# Altium PCB USB2CAN-base-0426.PcbDoc
Units mil, origin at the board's own origin, x right, y up, seen from the top; angles counter-clockwise.
Board outline 2199.85 x 1220.48 mil, 2 copper layers (Top, Bottom), stack 12.7 mil thick; 24 components, 18 nets, 98 pads, 21 vias.
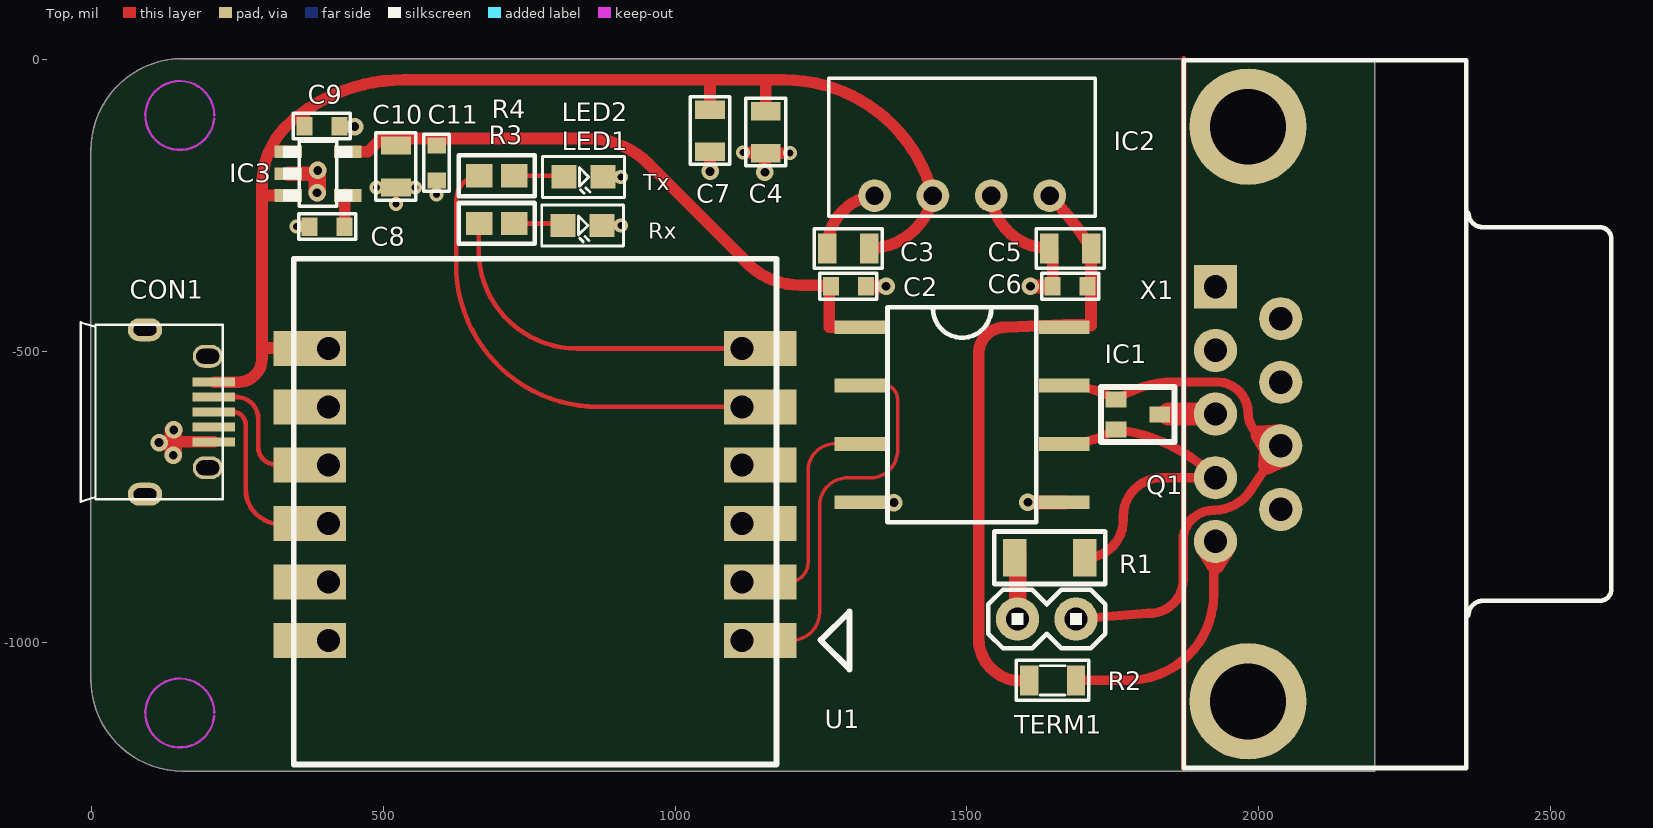
[diagram p0: Top view]
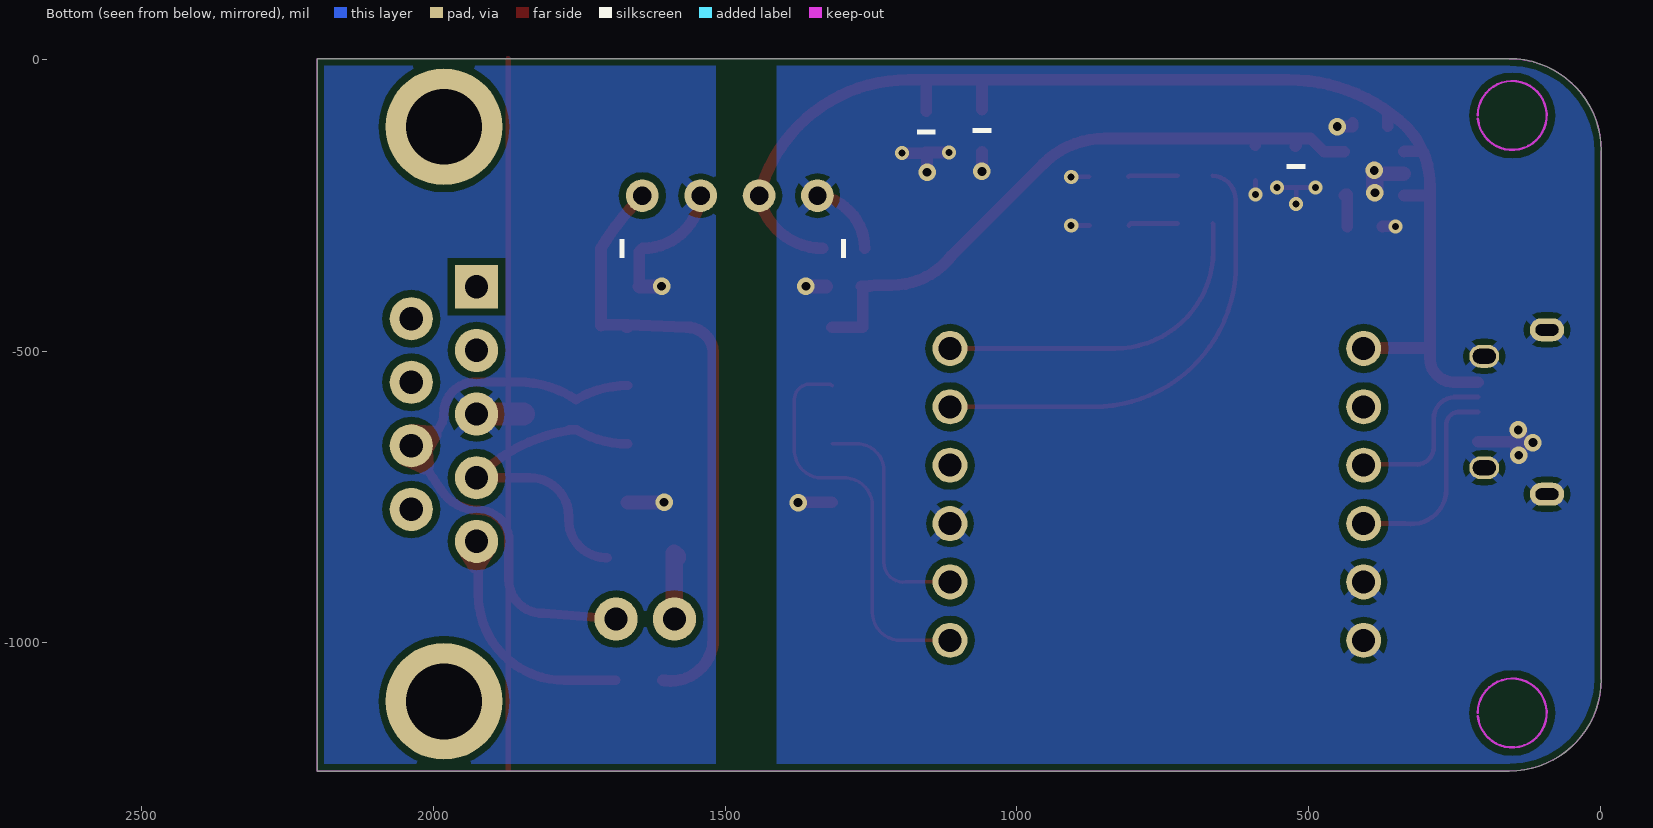
[diagram p1: Bottom view, seen from below]

## Layer stack, top to bottom
Solder Mask Top: solder mask 0.4, Solder Resist, Dk 3.5
Top: signal copper 1.35
Dielectric 1: dielectric 10, FR-4, Dk 4.3
Bottom: signal copper 1.35
Solder Mask Bottom: solder mask 0.4, Solder Resist, Dk 3.5

## Board outline
-1.03,-156.58 -1.03,-1062.09 ccw(c156.45,-1062.09) 156.45,-1219.57 2198.82,-1219.58 2198.82,0.9 156.45,0.9 ccw(c156.45,-156.58)

## Design rules (kind name [scope] priority, off if disabled: settings)
Clearance "Clearance - Default - DEFAULT- SMD" [IsVia vs IsSMTPin] p1: gap=6 ignorepadtopadclearanceinfootprint=FALSE
Clearance "Clearance - Default - DEFAULT - Via" [IsVia vs IsVia] p2: gap=6 ignorepadtopadclearanceinfootprint=FALSE
Clearance "Clearance - Default - DEFAULT - Net" [All] p3: gap=6 ignorepadtopadclearanceinfootprint=FALSE except(0: Arc-Hole Track-Hole SMDPad-Hole THPad-Hole Via-Hole Fill-Hole Poly-Hole Region-Hole Text-Hole; 10: Text-Text; 12: Arc-Fill Arc-Poly Arc-Region Track-Fill Track-Poly Track-Region SMDPad-Fill SMDPad-Poly SMDPad-Region THPad-Fill THPad-Poly THPad-Region Via-Fill Via-Poly Via-Region Fill-Fill Fill-Poly Fill-Region Poly-Poly Poly-Region Region-Region)
ComponentClearance "ComponentClearance - Default - DEFAULT" [All] p1: gap=6 collisioncheckmode=3 verticalgap=10 showdistances=FALSE
FanoutControl Fanout_Small [(CompPinCount < 5)] p3: bgadir=Out bgaviamode=Centered fanoutstyle=Auto fanoutdirection=OutThenIn viagrid=1 // Fanout_Small (Default Rule)
FanoutControl Fanout_SOIC [IsSOIC] p4: bgadir=Out bgaviamode=Centered fanoutstyle=Auto fanoutdirection=Alternating viagrid=1 // Fanout_SOIC (Default Rule)
HoleToHoleClearance "HoleToHoleClearance - Default - DEFAULT" [All] p1: gap=6 allowstackedmicrovias=TRUE
Length "Default Length" [All] p1: maxlimit=50000 minlimit=0
MaxMinImpedance "Default Impedance" [All] p1: minimum=50.00 maximum=150.0
ParallelSegment "Default Parallel Segment Adjasent" [All] p1: limit=1000 gap=200
ParallelSegment "Default Parallel Segment Same Layer" [All] p2: limit=1000 gap=200
PlaneConnect "Default PlaneConnect" [All] p1: pad.planeconnectstyle=Relief pad.reliefexpansion=20 pad.reliefentries=4 pad.reliefconductorwidth=15 pad.reliefairgap=10 via.planeconnectstyle=Direct via.reliefexpansion=20 via.reliefentries=4 via.reliefconductorwidth=15 via.reliefairgap=10
PolygonConnect "PolygonConnect - Default SMT" [IsSMTPin] p1: thpad.connectstyle=Relief thpad.reliefconductorwidth=10 thpad.reliefentries=4 thpad.polygonreliefangle="45 Angle" thpad.airgapwidth=10 smdpad.connectstyle=Direct smdpad.reliefconductorwidth=10 smdpad.reliefentries=4 smdpad.polygonreliefangle="45 Angle" smdpad.airgapwidth=10 via.connectstyle=Direct via.reliefconductorwidth=10 via.reliefentries=4 via.polygonreliefangle="45 Angle" via.airgapwidth=10
PolygonConnect "PolygonConnect - Default Pad" [All] p2: thpad.connectstyle=Relief thpad.reliefconductorwidth=15 thpad.reliefentries=4 thpad.polygonreliefangle="45 Angle" thpad.airgapwidth=10 smdpad.connectstyle=Direct smdpad.reliefconductorwidth=15 smdpad.reliefentries=4 smdpad.polygonreliefangle="45 Angle" smdpad.airgapwidth=10 via.connectstyle=Direct via.reliefconductorwidth=15 via.reliefentries=4 via.polygonreliefangle="45 Angle" via.airgapwidth=10
RoutingLayers "RoutingLayers - Default - DEFAULT" [All] p1: top layer_v5=TRUE bottom layer_v5=TRUE
RoutingPriority "RoutingPriority - Default - DEFAULT" [All] p1: routingpriority=3
RoutingTopology "Default Routing Topology" [All] p1: topology=Shortest
RoutingVias "RoutingVias - Default - DEFAULT" [All] p1: holewidth=12 width=24 viastyle="Through Hole" minholewidth=12 minwidth=24 maxholewidth=12 maxwidth=24
SMDToCorner "SMDToCorner - Default - DEFAULT" [All] p1: distance=60000
SolderMaskExpansion [All] p1: expansion=4 istentingtop=FALSE
Width "Default Width" [All] p1: maxlimit=40 minlimit=5 preferedwidth=8
22 further rules are at their usual default settings.

## Components (designator, comment, footprint, x,y, rotation, side; value= is the part's Value field where it differs from the comment)
C2 "C0603-1" C0603-1 1296.75,-389.09 r0 top
C3 "C0805$2F$2-1" C0805$2F$2-1 1296.75,-324.09 r0 top
C4 "C0805$2F$2-1" C0805$2F$2-1 1155.36,-124.96 r270 top
C5 "C0805$2F$2-1" C0805$2F$2-1 1676.75,-324.09 r0 top
C6 "C0603-1" C0603-1 1676.75,-389.09 r180 top
C7 "C0805$2F$2-1" C0805$2F$2-1 1059.78,-122.38 r270 top
C8 "C0603-1" C0603-1 403.95,-286.89 r180 top
C9 "C0603-1" C0603-1 394.93,-114.68 r0 top
C10 "C0805$2F$2-1" C0805$2F$2-1 521.6,-183.87 r90 top
C11 "C0603-1" C0603-1 591.43,-177.69 r270 top
CON1 "MIC_USB-N" MIC_USB-N 210,-604.45 r270 top
IC1 "DUB-R-PDSO-G8-1" DUB-R-PDSO-G8-1 1491.67,-609.09 r270 top
IC2 "B0505S_V-1" B0505S_V-1 1491.67,-233.77 r0 top
IC3 "SOT23-5L-1" SOT23-5L-1 388.19,-196.26 r270 top
LED1 "LED-0603" LED-0603 841.6,-284.9 r0 top
LED2 "LED-0603" LED-0603 842.99,-201.64 r0 top
Q1 "NUP2125-SOT-323" NUP2125-SOT-323 1755.33,-608.77 r270 top
R1 "C1206" C1206 1641.67,-854.09 r0 top
R2 "R0805-1" R0805-1 1646.67,-1064.09 r0 top
R3 "R0603" R0603 694.48,-281.4 r270 top
R4 "R0603" R0603 694.48,-199.78 r270 top
TERM1 "1X02$2F$2-1" 1X02$2F$2-1 1686.67,-959.09 r180 top
U1 "UCAN_M" UCAN_M 346.86,-342.01 r0 top
X1 "DB9_MALE-1" DB9_MALE-1 1981.53,-607.93 r270 top

## Footprints (in the part's own frame and the unit in brackets; to place one, negate y for a bottom-side part, rotate by r counter-clockwise, add the part's x,y. Pads: shape width x height; smd on the part's side, far side on the other; paste and mask are expansions set on the pad)
1X02$2F$2-1 [mil]
  round 74 hole 40: 1(0,0) 2(100,0)
  silkscreen extent -50,-50 150,50
B0505S_V-1 [mil]
  round 56 hole 31.5: 1(-150,0) 2(-50,0) 3(50,0) 4(150,0)
  silkscreen extent -228,-35 228,201
C0603-1 [mm]
  rect 0.7x0.8 smd: 1(-0.762,0) 2(0.762,0)
  silkscreen extent -1.24,-0.56 1.24,0.56
C0805$2F$2-1 [mm]
  rect 0.8x1.3 smd: 1(0.914,0) 2(-0.914,0)
  silkscreen extent -1.47,-0.86 1.47,0.86
C1206 [mil]
  rect 40x65 smd: 1(-60,0) 2(60,0)
  silkscreen extent -95,-45 95,45
DB9_MALE-1 [mil]
  round 74 hole 40: 1(218.11,-55.9) 2(109.06,-55.9) 3(0,-55.9) 4(-109.05,-55.9) 6(163.39,55.91) 7(54.33,55.91) 8(-54.33,55.91) 9(-163.38,55.91)
  rect 74x74 hole 40: 5(-218.11,-55.9)
  round 200 hole 130: G1(-492.12,0) G2(492.13,0)
  silkscreen extent -606,-110 606,622
DUB-R-PDSO-G8-1 [mm]
  rect 0.6x2.2 smd: 1(-3.81,-4.445) 2(-1.27,-4.445) 3(1.27,-4.445) 4(3.81,-4.445) 5(3.81,4.445) 6(1.27,4.445) 7(-1.27,4.445) 8(-3.81,4.445)
  silkscreen extent -4.67,-3.25 4.68,3.23
LED-0603 [mil]
  rect 43x40 smd: A(-33.5,0) K(33.5,0)
  silkscreen extent -70,-35 70,35
MIC_USB-N [mm]
  rect 0.4x1.85 smd: 1(-1.3,0) 2(-0.65,0) 3(0,0) 4(0.65,0) 5(1.3,0)
  oval 1x1.5 hole 0.5 slot 1 at 90 deg: 6(-3.575,-3) 7(3.575,-3)
  oval 1x1.3 hole 0.65 slot 1 at 90 deg: 10(-2.425,-0.27) 11(2.425,-0.27)
  silkscreen extent -3.9,-5.8 3.9,0.38
NUP2125-SOT-323 [mm]
  rect 0.7x0.9 smd: 1(-0.65,0) 2(0.65,0) 3(0,1.9)
  silkscreen extent -1.2,-0.65 1.19,2.54
R0603 [mil]
  rect 40x45 smd: 1(0,30) 2(0,-30)
  silkscreen extent -35,-65 35,65
R0805-1 [mm]
  rect 0.8x1.3 smd: 1(-1.016,0) 2(1.016,0)
  silkscreen extent -1.57,-0.86 1.57,0.86
SOT23-5L-1 [mm]
  rect 0.55x1.2 smd: 1(-0.95,-1.3) 2(0,-1.3) 3(0.95,-1.3) 4(0.95,1.3) 5(-0.95,1.3)
  silkscreen extent -1.42,-1.5 1.42,1.5
UCAN_M [mm]
  round 1.524 hole 1: 1(19.5,-16.6) 2(19.5,-14.06) 3(19.5,-11.52) 4(19.5,-8.98) 5(19.5,-6.44) 6(19.5,-3.9) 7(1.5,-3.9) 8(1.5,-6.44) 9(1.5,-8.98) 10(1.5,-11.52) 11(1.5,-14.06) 12(1.5,-16.6)
  rect 3.15x1.524 smd: 1(20.3,-16.6) 2(20.3,-14.06) 3(20.3,-11.52) 4(20.3,-8.98) 5(20.3,-6.44) 6(20.3,-3.9) 7(0.7,-3.9) 8(0.7,-6.44) 9(0.7,-8.98) 10(0.7,-11.52) 11(0.7,-14.06) 12(0.7,-16.6)
  silkscreen extent 0,-22 24.18,0

## Via types
v1: diameter 30, hole 15, Top to Bottom, tented both sides, 12 vias
v2: diameter 24, hole 12, Top to Bottom, tented both sides, 9 vias

## Nets (pads, with @x,y where several pads share a name; then routed paths per layer and width w, separated by ;. In a path a pad name is that pad's centre, name@x,y a point inside that pad or via, vN(x,y) a via of type N, cw(c..) or ccw(c..) an arc to the next point about the centre after c; other vN are vias at no path point)
$$$1: C8.1 IC3.4 | length 61.1
  Top w20: C8.1 433.95,-231.93 437.65,-231.93 IC3.4
$$$2: LED2.A R4.1 | length 85.8
  Top w8: R4.1 807.63,-199.78 LED2.A
$$$3: LED1.A R3.1 | length 85.1
  Top w8: R3.1 804.61,-281.4 LED1.A
$$$14: R2.2 X1.1 | length 522.1
  Top w16: R2.2 1775.43,-1064.09 ccw(c1775.43,-916.87) 1920.87,-939.74 1920.87,-939.67 ccw(c1785.35,-917.57) 1922.67,-917.57 1922.67,-875.68 1925.39,-872.95 ccw(c1875.63,-868.13) 1925.63,-868.13 1925.63,-866.04 X1.1
  Top w32: X1.1@1907.76,-837.07 1925.63,-866.04 1943.5,-837.07 X1.1 X1.1@1907.76,-837.07
$$$18: R1.1 TERM1.2 | length 123.1
  Top w30: R1.1 1581.67,-851.11 1586.67,-846.1 TERM1.2
CANH: IC1.7 Q1.1 TERM1.1 X1.7 | length 1271.4
  Top w8: Q1.1 1755.52,-582.98 Q1.1@1755.62,-582.98 ; X1.7@2033.12,-664.79 2033.12,-662.6 X1.7@2032.58,-662.06 ; X1.7@2032.58,-662.06 X1.7@2037.23,-662.06 ; X1.7@2032.58,-662.06 X1.7@2037.23,-662.06 ; X1.7@2037.23,-662.06 X1.7 X1.7@2037.23,-662.06
  Top w16: IC1.7 cw(c1666.67,-734.35) 1753.64,-582.2 1753.81,-582.2 1754.05,-582.43 cw(c1666.67,-734.35) Q1.1 ; TERM1.1 1809.99,-949.32 1810.08,-949.32 ccw(c1812.48,-891.33) 1870.52,-891.33 1870.52,-816.64 1870.67,-816.49 cw(c1921.53,-824.4) 1921.53,-772.93 1921.58,-772.88 1924.45,-772.88 ccw(c1921.53,-695.08) 1986.51,-737.96 ; Q1.1@1755.62,-582.98 cw(c1854.21,-730.57) 1854.21,-553.08 1932.01,-553.08 cw(c1928.11,-606.36) 1981.53,-606.36 1981.6,-606.43 1981.6,-608.93 ccw(c2025.34,-606.36) 2002.1,-643.5 ; 1986.53,-737.94 cw(c6088.56,-3442.56) 2014.9,-695.4 cw(c6088.56,-3442.56) X1.7 X1.7@2011.53,-647.94 ; X1.7@2016.42,-661.39 X1.7@2011.53,-647.94 ; 2002.1,-643.5 ccw(c2025.34,-606.36) X1.7@2011.53,-647.94 ; 2002.1,-643.5 ccw(c2025.34,-606.36) X1.7@2011.53,-647.94
  Top w21.94: 2002.1,-643.5 X1.7@2011.53,-647.94
  Top w32: X1.7@2032.58,-662.06 X1.7@2016.42,-661.39 ; X1.7@2033.12,-664.79 X1.7@2019.32,-672.88 ; X1.7@2013.56,-663.06 X1.7@2016.42,-661.39 ; X1.7@2013.56,-663.06 X1.7@2019.32,-672.88 ; X1.7@2013.56,-663.06 2002.1,-643.5 2036.09,-641.31 X1.7 ; X1.7@2015.91,-672.73 2014.9,-695.4 2045.97,-681.5 X1.7 ; X1.7@2015.91,-672.73 X1.7@2019.32,-672.88 ; X1.7@2015.91,-672.73 X1.7@2016.42,-661.39 ; X1.7@2016.42,-661.39 X1.7@2019.32,-672.88 ; X1.7@2019.32,-672.88 X1.7
CANL: IC1.6 Q1.2 R1.2 X1.2 | length 772.6
  Top w16: IC1.6 ccw(c1666.67,-487.84) Q1.2@1754.42,-634.9 ; R1.2 1704.97,-854.09 1705.05,-854.09 ccw(c1703,-789.25) 1767.87,-789.25 1767.87,-783.13 cw(c1833.99,-783.12) 1833.99,-716.99 X1.2 ; Q1.2@1754.49,-634.83 Q1.2@1754.42,-634.9 ; Q1.2@1754.54,-634.83 1755.01,-634.36 Q1.2 ; Q1.2@1754.42,-634.9 1766.56,-634.9 Q1.2@1767.76,-636.11 ; Q1.2@1767.76,-636.11 cw(c1721.27,-921.35) X1.2 ; Q1.2@1767.76,-636.11 cw(c1721.27,-921.35) X1.2
CANRX: IC1.2 U1.1 | length 698.2
  Top w6: U1.1@1114.58,-995.55 1198.85,-995.55 ccw(c1199.43,-947.36) 1247.62,-947.36 1247.62,-764.53 cw(c1294.86,-764.53) 1291.48,-717.41 1333.74,-717.41 ccw(c1333.74,-669.96) 1381.05,-673.66 1381.05,-583.07 ccw(c1354.66,-583.07) 1350.72,-556.98 1318.78,-556.98 IC1.2
CANTX: IC1.3 U1.2 | length 404.8
  Top w6: U1.2@1114.58,-895.55 1190.41,-895.55 ccw(c1194.12,-861.96) 1227.93,-861.96 1227.93,-704.65 cw(c1273.72,-704.65) 1269.02,-659.09 IC1.3
COLDVDD: C5.1 C6.1 IC1.8 IC2.4 R2.1 | length 1096.4
  Top w20: R2.1 1604.55,-1064.09 1604.12,-1064.53 1602.5,-1064.53 1602.23,-1064.79 cw(c1593.11,-992.23) 1519.97,-992.23 1519.97,-501.71 cw(c1565.68,-504.91) 1565.68,-459.09 1667.04,-454.97 1667.23,-454.78 1710.77,-454.78 1712.54,-456.55 1712.54,-324.3 C5.1 ccw(c1298.52,-576.92) IC2.4 ; IC1.8 1669.37,-459.12 1669.37,-457.22 1671.81,-454.78 1671.74,-454.78 1667.77,-454.94 IC1.8@1667.07,-454.94
COLDVSS: C5.2 C6.2 IC1.5 IC2.3 Q1.3 X1.3 | length 410.8
  Top w8: Q1.3 1830.97,-607.93 Q1.3@1845.22,-607.93
  Top w20: IC2.3 ccw(c1640.75,-224.59) C5.2 1646.75,-330.09 C6.2
  Top w24: v1(1604.4,-759.09) IC1.5 ; v1(1608.62,-389.09) C6.2
  Top w40: Q1.3@1845.22,-607.93 X1.3
DM: CON1.2 U1.9 | length 283.4
  Top w8: CON1.2 251.13,-578.86 cw(c248.9,-615.79) 285.89,-615.79 285.89,-664.66 ccw(c315.5,-664.66) 318.7,-694.1 404.46,-694.09 U1.9@405.92,-695.55
DP: CON1.3 U1.10 | length 353
  Top w8: CON1.3 245.55,-604.45 cw(c242.52,-626.09) 264.37,-626.09 264.37,-736.39 ccw(c324.35,-736.39) 334.27,-795.55 U1.10@405.92,-795.55
GND: C2.2 C3.2 C4.1 C7.1 C8.2 C9.2 C10.2 C11.2 CON1.5 CON1.6 CON1.7 CON1.10 CON1.11 IC1.4 IC2.1 IC3.2 LED1.K LED2.K U1.3 U1.11 U1.12 | length 849.7
  Top w8: v2@488.93,-219.87 C10.2 ; v2(521.6,-247.7) C10.2 ; v2@554.37,-219.87 C10.2 ; v2(591.4,-232) C11.2 ; LED1.K v2(906.9,-284.9) ; LED2.K LED2.K v2(906.9,-201.6)
  Top w15: C9.2 C9.2@424.93,-109.28
  Top w20: v1(116.06,-656.73) 113.1,-655.63 CON1.5 ; v2(351.7,-286.5) 373.56,-286.5 C8.2 ; C9.2@424.93,-109.28 424.93,-115.49 v1(451.3,-115.46) ; C7.1 1059.83,-158.43 v1(1059.83,-192.34) ; v2(1116.05,-159.92) 1157.23,-159.92 C4.1@1158.27,-160.96 ; v1(1153.86,-193.81) 1153.86,-162.47 C4.1 C4.1@1158.27,-160.96 ; v2(1196.63,-160.96) C4.1@1158.27,-160.96 ; C3.2 cw(c1351.62,-324.09) IC2.1 ; IC1.4 1374.4,-759.09 v1(1374.92,-759.62)
  Top w24: C2.2 v1(1361.38,-389.09)
  Top w25: IC3.2 v1@386.6,-196.26
  Top w30: v1(140.3,-678.6) 140.3,-635.8 v1(141,-635.1) ; v1(386.6,-228.9) 386.6,-196.26 386.6,-191.7 v1(387.7,-190.6)
  other v2: 488.9,-219.9 554.4,-219.9
LED_RX: R3.2 U1.6 | length 593.5
  Top w8: R3.2 663.41,-282.47 663.41,-329.27 ccw(c831.69,-327.26) 831.69,-495.55 U1.6@1114.58,-495.55
LED_TX: R4.2 U1.5 | length 802.6
  Top w8: R4.2 ccw(c666.45,-241.05) 625.13,-241.05 625.13,-366.98 ccw(c868.85,-351.34) 868.85,-595.55 U1.5@1114.58,-595.55
VBUS: C3.1 C4.2 C7.2 C9.1 CON1.1 IC2.2 IC3.1 IC3.3 U1.7 | length 5418.7
  Top w20: CON1.1 251.55,-553.27 ccw(c251.55,-512.44) 292.38,-512.44 ccw(c251.55,-512.44) 292.24,-509.12 292.24,-494.69 ; IC3.3 336.93,-233.58 292.24,-233.58 292.24,-222.36 ; IC3.1 336.16,-158.01 304.65,-158.01 ; C9.1 364.93,-91.48 371.9,-84.51 372.12,-84.51 ; U1.7@405.92,-495.55 405.05,-494.69 292.24,-494.69 ; C7.2 1059.78,-35.46 1059.67,-35.35 ; C4.2 1155.36,-36.28 1154.44,-35.35 ; C3.1 ccw(c1332.75,-213.25) 1440.02,-241.12 ccw(c1332.75,-213.25) IC2.2 ; 292.24,-494.69 292.24,-222.36 ; 292.24,-222.36 292.24,-216.98 ; 292.24,-216.98 cw(c438.59,-216.98) 304.65,-158.01 ; 292.24,-216.98 cw(c438.59,-216.98) 304.65,-158.01 ; 292.24,-216.98 cw(c438.59,-216.98) 304.65,-158.01 ; 304.65,-158.01 cw(c438.59,-216.98) 329.37,-119.58 ; 304.65,-158.01 cw(c438.59,-216.98) 329.37,-119.58 ; 304.65,-158.01 cw(c438.59,-216.98) 329.37,-119.58 ; 304.65,-158.01 cw(c438.59,-216.98) 329.37,-119.58 ; 329.37,-119.58 329.37,-119.46 330.43,-118.4 330.43,-118.23 332.76,-115.91 ; 332.76,-115.91 cw(c534.66,-328.67) 372.12,-84.51 ; 332.76,-115.91 cw(c534.66,-328.67) 372.12,-84.51 ; 332.76,-115.91 cw(c534.66,-328.67) 372.12,-84.51 ; 332.76,-115.91 cw(c534.66,-328.67) 372.12,-84.51 ; 372.12,-84.51 cw(c534.66,-328.67) 534.66,-35.35 ; 372.12,-84.51 cw(c534.66,-328.67) 534.66,-35.35 ; 372.12,-84.51 cw(c534.66,-328.67) 534.66,-35.35 ; 372.12,-84.51 cw(c534.66,-328.67) 534.66,-35.35 ; 372.12,-84.51 cw(c534.66,-328.67) 534.66,-35.35 ; 534.66,-35.35 1059.67,-35.35 ; 1059.67,-35.35 1154.44,-35.35 ; 1154.44,-35.35 1186.18,-35.35 ; 1186.18,-35.35 cw(c1186.18,-299.05) IC2.2 ; 1186.18,-35.35 cw(c1186.18,-299.05) IC2.2 ; 1186.18,-35.35 cw(c1186.18,-299.05) IC2.2 ; 1186.18,-35.35 cw(c1186.18,-299.05) IC2.2 ; 1186.18,-35.35 cw(c1186.18,-299.05) IC2.2 ; 1186.18,-35.35 cw(c1186.18,-299.05) IC2.2 ; 1186.18,-35.35 cw(c1186.18,-299.05) IC2.2
VDD: C2.1 C10.1 C11.1 IC1.1 IC3.5 | length 1650.1
  Top w20: IC3.5 474,-158.86 496.9,-135.96 643.25,-135.96 ; C10.1 C10.1@522.9,-149.17 ; 569.54,-135.96 C11.1@591.15,-135.96 ; C11.1 591.43,-136.23 C11.1@591.15,-135.96 ; IC1.1 1312.95,-459.05 1264.27,-459.05 1264.27,-391.57 C2.1 C2.1@1260.94,-389.09 ; C11.1@591.15,-135.96 643.25,-135.96 ; 643.25,-135.96 849.55,-135.96 ; 849.55,-135.96 cw(c849.55,-284.99) 955.72,-180.4 ; 849.55,-135.96 cw(c849.55,-284.99) 955.72,-180.4 ; 849.55,-135.96 cw(c849.55,-284.99) 955.72,-180.4 ; 955.72,-180.4 1111.62,-336.3 ; 1111.62,-336.3 ccw(c1214.7,-257.54) 1214.7,-387.26 ; 1111.62,-336.3 ccw(c1214.7,-257.54) 1214.7,-387.26 ; 1111.62,-336.3 ccw(c1214.7,-257.54) 1214.7,-387.26 ; 1214.7,-387.26 1243.53,-387.26 ; 1243.53,-387.26 ccw(c1260.09,-313.56) C2.1@1260.94,-389.09 ; 1243.53,-387.26 ccw(c1260.09,-313.56) C2.1@1260.94,-389.09 ; 1243.53,-387.26 ccw(c1260.09,-313.56) C2.1@1260.94,-389.09
pads on no net: CON1.4 U1.4 U1.8 X1.4 X1.5 X1.6 X1.8 X1.9 X1.G1 X1.G2
copper on no net: | length 1216.5
  Top w10: 1871.26,-1216.54 1871.26,0

## Polygon pours and split planes (outlines as drawn)
GND on Bottom (solid, remove dead copper, pour order 0): 0,0 1411.29,0 1411.29,-1228.75 0,-1228.75
COLDVSS on Bottom (solid, remove dead copper, pour order 1): 1515.63,0 2195.83,0 2195.83,-1218.43 1515.63,-1218.43

## Keep-outs
Keep-Out Layer:
  lines w0.31: -1.03,-1062.09 ccw(c156.45,-1062.09) 156.45,-1219.57 2198.82,-1219.58 2198.82,0.9 156.45,0.9 ccw(c156.45,-156.58) -1.03,-156.58 -1.03,-1062.09
  lines w4: 210.39,-1125.43 cw(c151.57,-1120.08) 210.63,-1120.08 ; 210.39,-101.81 cw(c151.57,-96.46) 210.63,-96.46

## Silkscreen, mask and mechanical layers (free items; w line width, h text height)
Silkscreen Top:
  text "Tx" at 945.3,-224.8 h27.5
  text "Rx" at 954.16,-307.47 h27.5
Solder Mask Top:
  region: 1421.52,10.38 1506.98,10.38 1506.98,-1215.63 1421.52,-1215.63 1421.52,10.38
  text "Ver1.0" at 247.26,-1027.66 h27.5 r90